# Altium PCB Shield.pcbdoc (part 1 of 2)
Units mm, origin at the board's own origin, x right, y up, seen from the top; angles counter-clockwise.
Board outline 57.12 x 53.38 mm, 2 copper layers (Top Layer, Bottom Layer); 40 components, 41 nets, 141 pads, 717 vias.
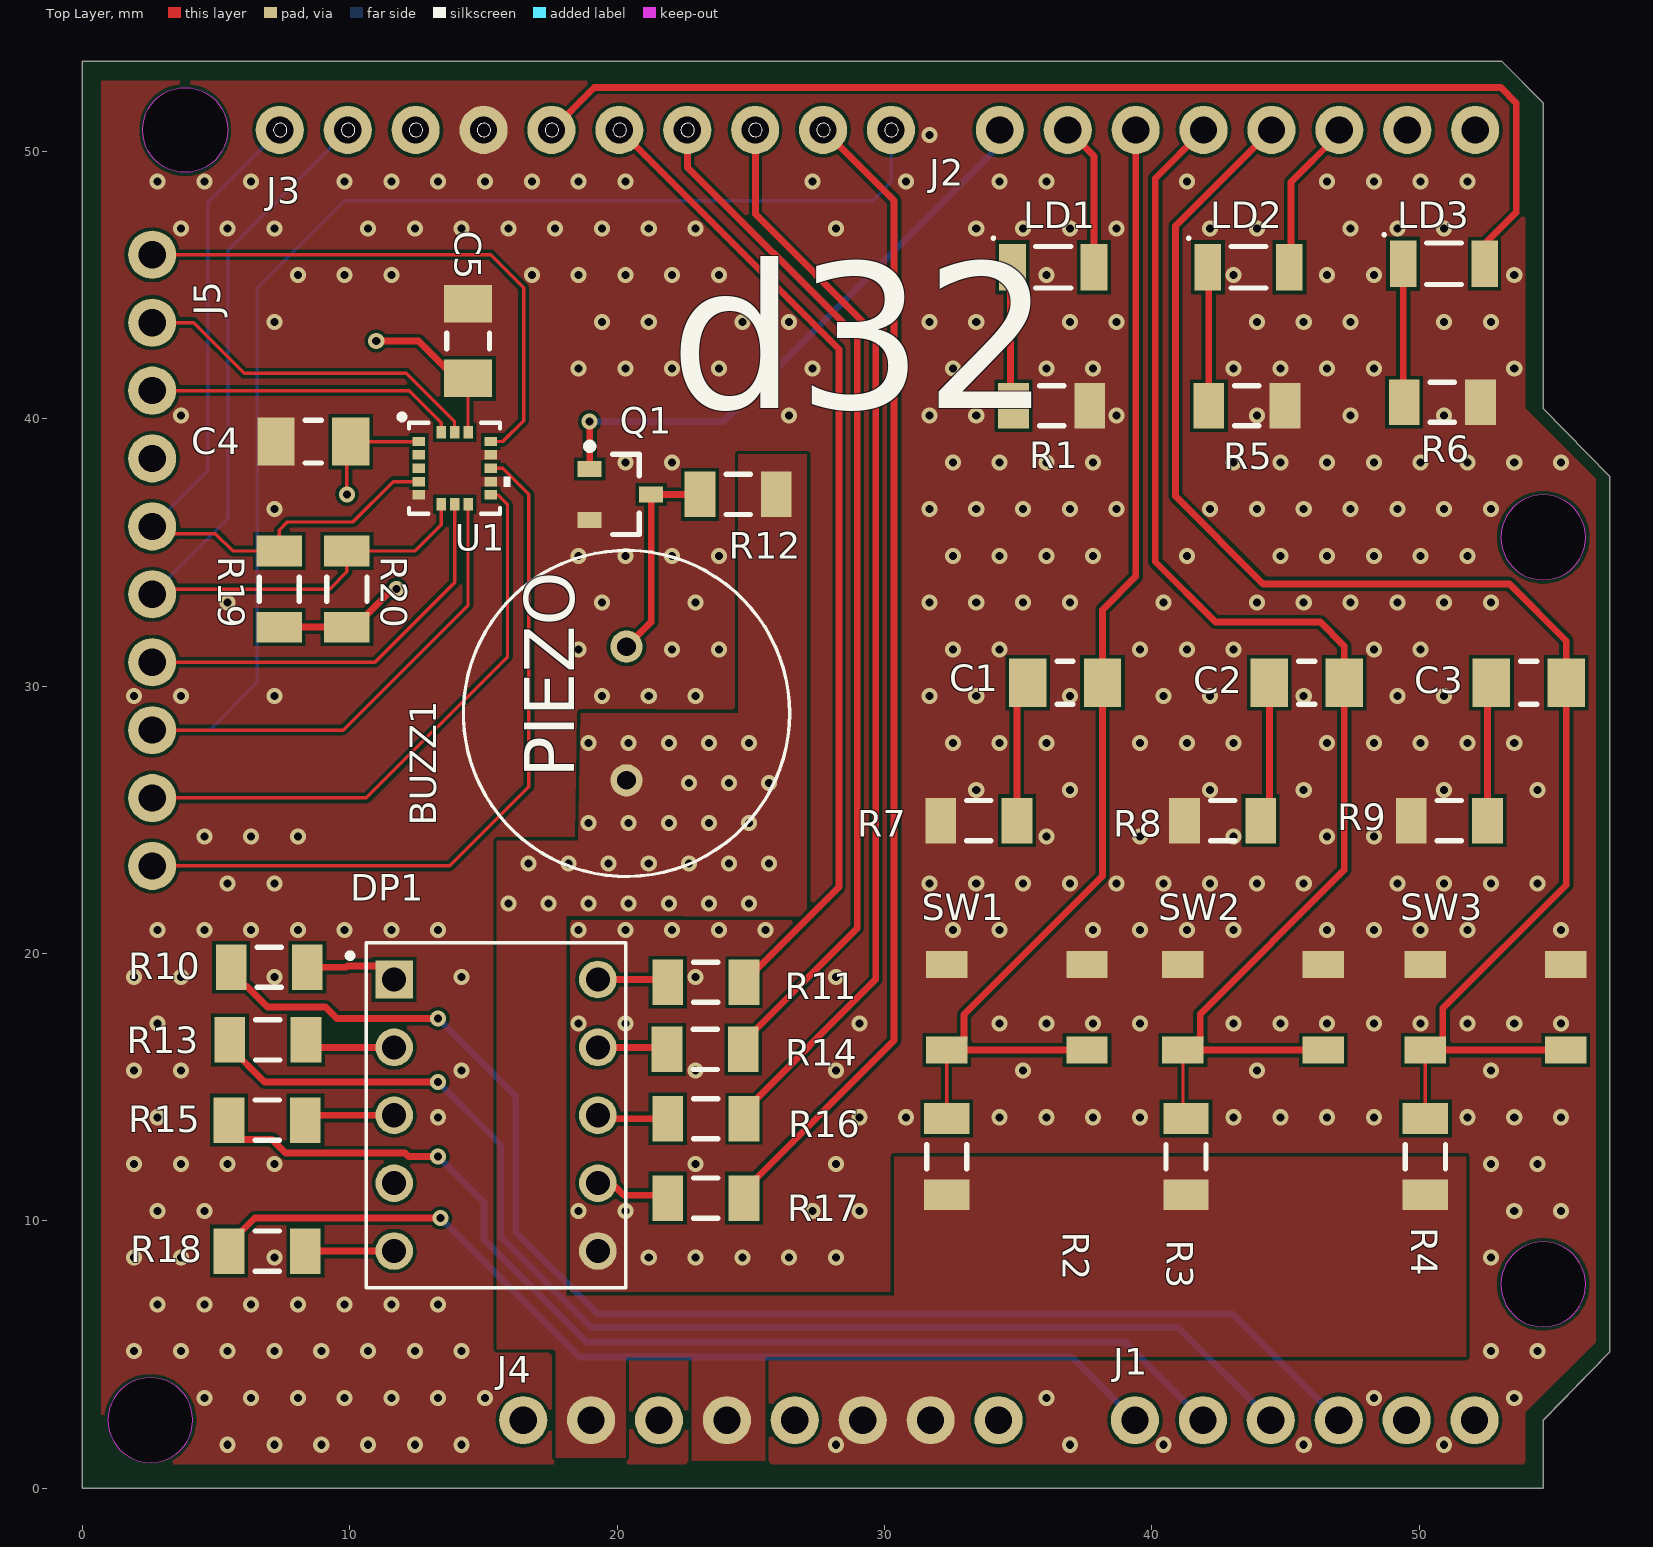
[diagram p0: Top Layer view]
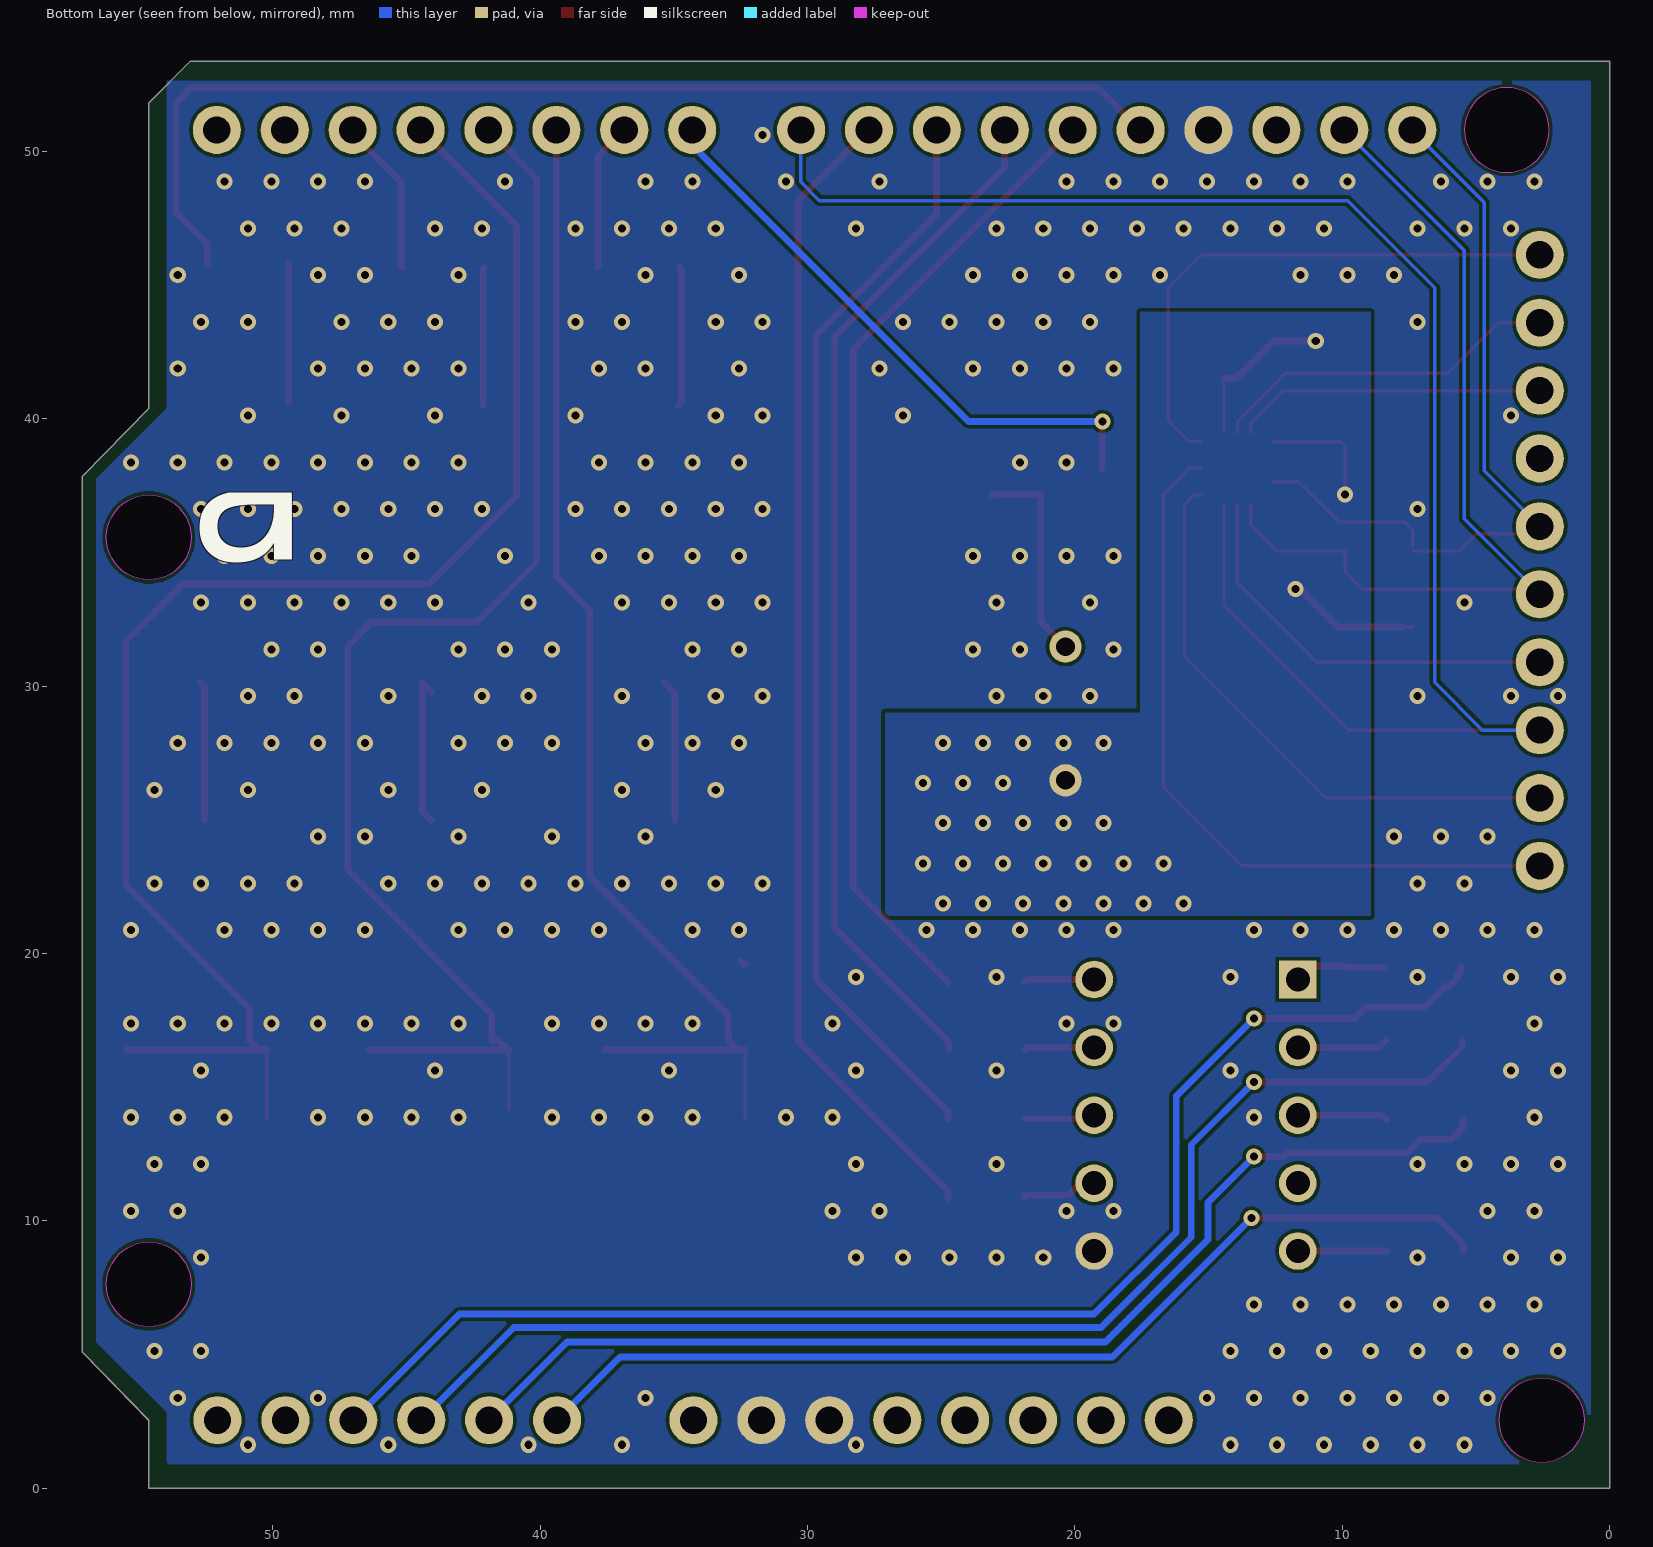
[diagram p1: Bottom Layer view, seen from below]
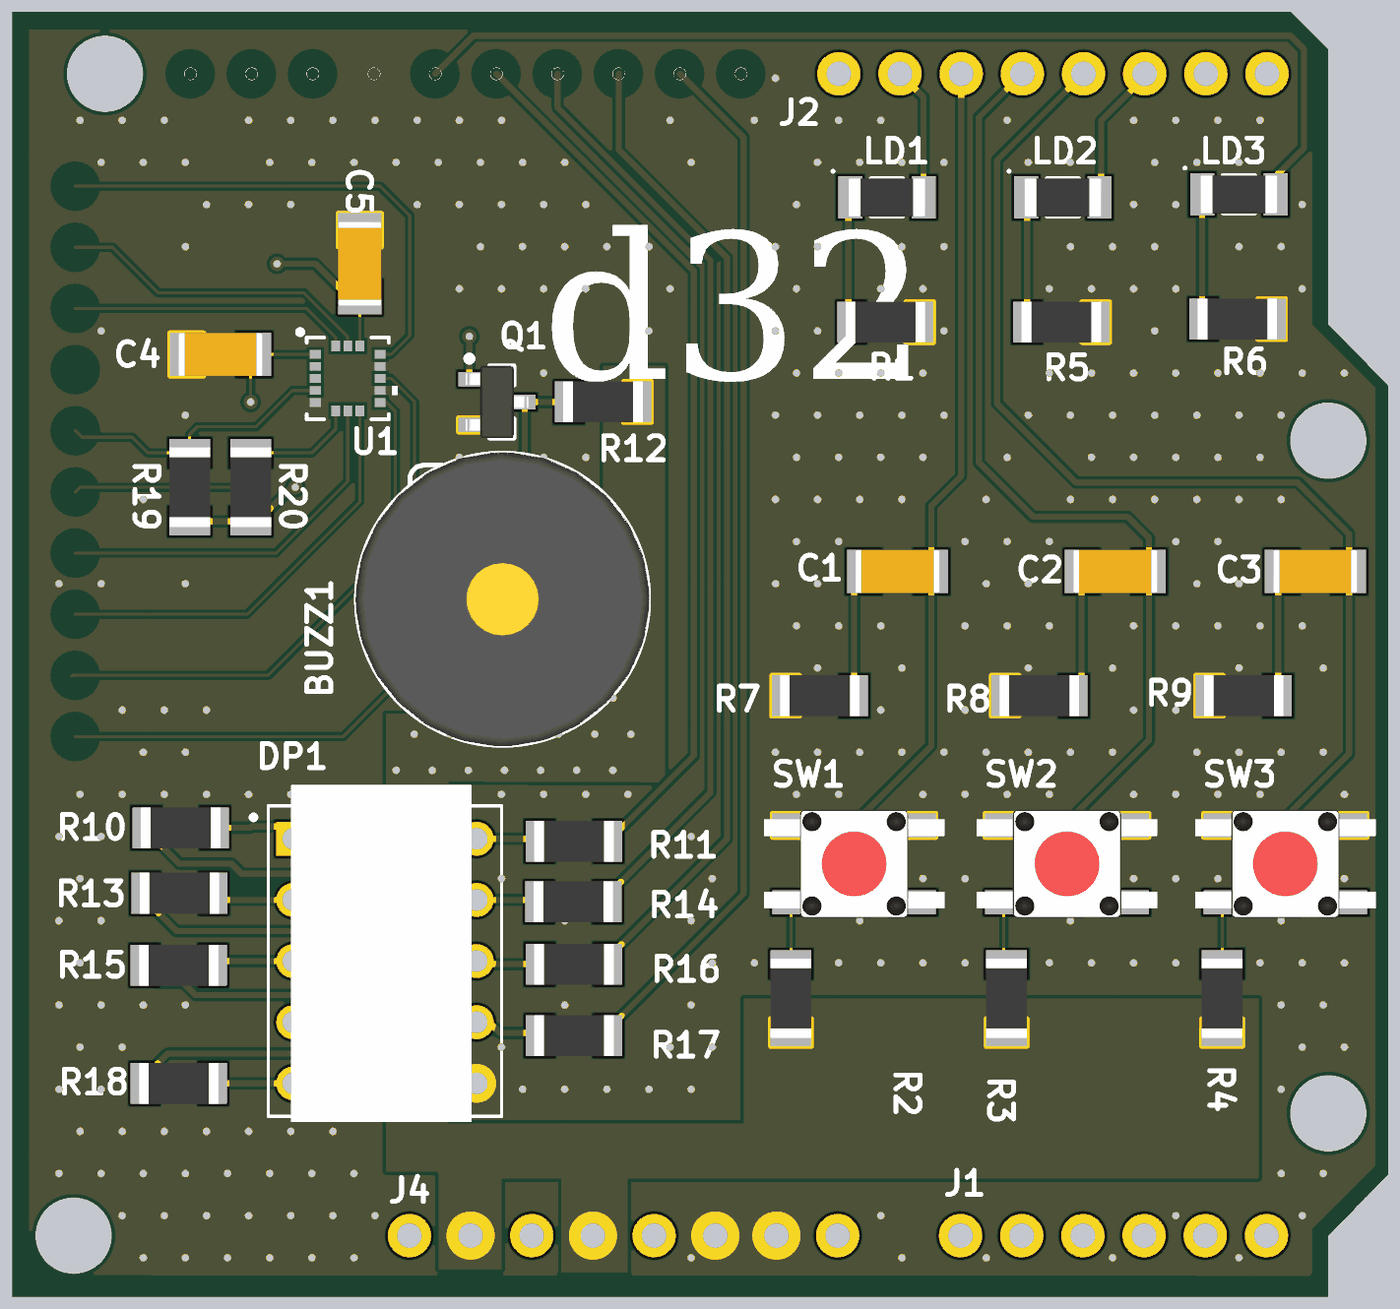
[diagram p2: 3D render of the assembled board from above, using the file's embedded part models]

## Layer stack, top to bottom
Top Solder: solder mask 0.0102, Solder Resist, Dk 3.2
Top Layer: signal copper 0.0356
Dielectric1: dielectric 0.32, FR-4, Dk 4.8
Bottom Layer: signal copper 0.0356
Bottom Solder: solder mask 0.0102, Solder Resist, Dk 3.2

## Board outline
0,0 0,53.378 53.075,53.378 54.64,51.814 54.64,40.386 57.12,37.846 57.12,5.08 54.64,2.54 54.64,0
cut-out: 0.953,2.54 ccw(c2.54,2.54) 2.54,0.953 ccw(c2.54,2.54) 4.127,2.54 ccw(c2.54,2.54) 2.54,4.127 ccw(c2.54,2.54)
cut-out: 53.052,7.62 ccw(c54.64,7.62) 54.64,6.032 ccw(c54.64,7.62) 56.227,7.62 ccw(c54.64,7.62) 54.64,9.207 ccw(c54.64,7.62)
cut-out: 53.052,35.56 ccw(c54.64,35.56) 54.64,33.972 ccw(c54.64,35.56) 56.227,35.56 ccw(c54.64,35.56) 54.64,37.148 ccw(c54.64,35.56)
cut-out: 3.84,49.212 cw(c3.84,50.8) 2.252,50.8 cw(c3.84,50.8) 3.84,52.387 cw(c3.84,50.8) 5.427,50.8 cw(c3.84,50.8)

## Design rules (kind name [scope] priority, off if disabled: settings)
Clearance [All] p1: gap=0.127 ignorepadtopadclearanceinfootprint=FALSE except(0: Arc-Hole Track-Hole SMDPad-Hole THPad-Hole Via-Hole Fill-Hole Poly-Hole Region-Hole Text-Hole)
FabricationTestPointUsage TestPointUsage [All] p1: valid=0 allowmultiple=FALSE
FabricationTestpoint Testpoint [All] p1: side=3 testpointundercomponent=TRUE minsize=1.016 maxsize=2.54 preferedsize=1.524 minholesize=0 maxholesize=1.016 preferedholesize=0.813 testpointgrid=0.025 allowsidetop=TRUE allowsidebottom=TRUE usegrid=TRUE gridtolerance=0
PolygonConnect [All] p1: connectstyle=Direct reliefconductorwidth=0.254 reliefentries=4 polygonreliefangle="90 Angle" airgapwidth=0.254
RoutingVias [All] p1: holewidth=0.711 width=1.27 viastyle="Through Hole" minholewidth=0.2 minwidth=0.45 maxholewidth=0.711 maxwidth=1.27
SilkToSolderMaskClearance SilkscreenOverComponentPads [IsPad] p1: minsilkscreentomaskgap=0.254 clearancetoexposedcopper=TRUE
SolderMaskExpansion [All] p1: expansion=0.102
Width [All] p1: maxlimit=0.254 minlimit=0.127 preferedwidth=0.254
27 further rules are at their usual default settings.

## Components (designator, comment, footprint, x,y, rotation, side; value= is the part's Value field where it differs from the comment)
BUZZ1 "BUZZER" BUZZER 20.35,28.974 r90 top
C1 "100nF" CAPC3216X12N 36.754,30.124 r0 top
C2 "100nF" CAPC3216X12N 45.796,30.124 r0 top
C3 "100nF" CAPC3216X12N 54.102,30.124 r0 top
C4 "10uF" CAPC3216X12N 8.639,39.144 r0 top
C5 "100nF" CAPC3216X12N 14.422,42.907 r270 top
DP1 "7-SEG" 7-SEG-DISPLAY 15.469,13.945 r0 top
J1 "6-POS-ARDUINO" "PIN 6" 39.37,2.54 r0 top
J2 "8-POS-ARDUINO" "PIN 8" 52.07,50.8 r180 top
J3 "10-POS-ARDUINO" "PIN 10" -61.334,50.8 r180 top
J4 "8-POS-ARDUINO" "PIN 8" 16.51,2.54 r0 top
J5 "10-POS-ARDUINO" "PIN 10" 2.607,-45.443 r270 top
LD1 "RED" DIOC3216X21N 36.311,45.667 r180 top
LD2 "GREEN" DIOC3216X21N 43.619,45.667 r180 top
LD3 "AMBER" DIOC3216X21N 50.927,45.796 r180 top
Q1 "MMBT3904,215" SOT95P230X110-3N 20.123,37.168 r0 top
R1 "240" RESC3115X06N 36.249,40.485 r0 top
R2 "4K7" RESC3115X06N 32.325,12.4 r270 top
R3 "4K7" RESC3115X06N 41.279,12.4 r270 top
R4 "4K7" RESC3115X06N 50.232,12.4 r270 top
R5 "240" RESC3115X06N 43.557,40.485 r0 top
R6 "240" RESC3115X06N 50.865,40.615 r0 top
R7 "100" RESC3115X06N 33.528,24.968 r0 top
R8 "100" RESC3115X06N 42.647,24.968 r0 top
R9 "100" RESC3115X06N 51.13,24.968 r0 top
R10 "100" RESC3115X06N 6.985,19.482 r180 top
R11 "100" RESC3115X06N 23.317,18.923 r180 top
R12 "1K" RESC3115X06N 24.527,37.168 r0 top
R13 "100" RESC3115X06N 6.934,16.764 r180 top
R14 "100" RESC3115X06N 23.292,16.408 r180 top
R15 "100" RESC3115X06N 6.909,13.767 r180 top
R16 "100" RESC3115X06N 23.317,13.818 r180 top
R17 "100" RESC3115X06N 23.317,10.846 r180 top
R18 "100" RESC3115X06N 6.909,8.865 r180 top
R19 "4K7" RESC3115X06N 7.359,33.628 r270 top
R20 "4K7" RESC3115X06N 9.892,33.628 r270 top
SW1 "BTN" BUTTON 34.95,17.983 r0 top
SW2 "BTN" BUTTON 43.79,17.983 r0 top
SW3 "BTN" BUTTON 52.857,17.983 r0 top
U1 "LIS3DHTR" LGA16 13.923,38.195 r0 top

## Footprints (in the part's own frame and the unit in brackets; to place one, negate y for a bottom-side part, rotate by r counter-clockwise, add the part's x,y. Pads: shape width x height; smd on the part's side, far side on the other; paste and mask are expansions set on the pad)
7-SEG-DISPLAY [mm]
  rect 1.408x1.408 hole 0.9: 1(-3.81,5.08)
  round 1.408 hole 0.9: 2(-3.81,2.54) 3(-3.81,0) 4(-3.81,-2.54) 5(-3.81,-5.08) 6(3.81,-5.08) 7(3.81,-2.54) 8(3.81,0) 9(3.81,2.54) 10(3.81,5.08)
  silkscreen extent -5.56,-6.45 4.85,6.45, body extent -3.9,-6.68 3.6,7.33, height 8.5
BUTTON [mm]
  rect 1.55x1 smd: 1(-2.625,1.6) 2(2.625,1.6) 3(-2.625,-1.6) 4(2.625,-1.6)
  body extent -3.75,-2.25 3.75,2.25, height 3.8
BUZZER [mm]
  round 1.208 hole 0.7: 1(-2.5,0) 2(2.5,0)
  silkscreen extent -6.1,-6.1 6.1,6.1, body extent -6.1,-6.1 6.1,6.1, height 6
CAPC3216X12N [mm] "Chip Capacitor, 2-Leads, Body 3,20x1,60mm, IPC Medium Density"
  rect 1.4x1.8 smd: 1(-1.4,0) 2(1.4,0)
  silkscreen extent -0.3,-0.8 0.3,0.8, body extent -1.75,-0.9 1.75,0.9, height 1.2
DIOC3216X21N [mm] "Chip Diode, 2-Leads, Body 3,20x1,60mm, IPC Medium Density"
  rect 1x1.75 smd: 1(-1.525,0) 2(1.525,0)
  silkscreen extent -0.65,-1.14 2.29,0.77, body extent -1.6,-0.8 1.6,0.8, height 2.06
LGA16 [mm]
  rect 0.456x0.354 smd paste+0 mask+0: 1(-1.347,0.953) 2(-1.347,0.453) 3(-1.347,-0.047) 4(-1.347,-0.547) 5(-1.347,-1.047) 9(1.345,-1.047) 10(1.345,-0.547) 11(1.345,-0.047) 12(1.345,0.453) 13(1.345,0.953)
  rect 0.354x0.456 smd paste+0 mask+0: 6(-0.501,-1.393) 7(-0.001,-1.393) 8(0.499,-1.393) 14(0.499,1.299) 15(-0.001,1.299) 16(-0.501,1.299)
  silkscreen extent -2.05,-1.75 2.08,1.95, body extent -1.78,-1.83 1.78,1.73, height 0.25
"PIN 6" [mm]
  round 1.8 hole 1.02: 1(0,0) 2(2.54,0) 3(5.08,0) 4(7.62,0) 5(10.16,0) 6(12.7,0)
"PIN 8" [mm]
  round 1.8 hole 1.02: 1(-0.025,0) 2(2.515,0) 3(5.055,0) 4(7.595,0) 5(10.135,0) 6(12.675,0) 7(15.215,0) 8(17.755,0)
"PIN 10" [mm]
  round 1.8 hole 1.02: 1(-91.575,0) 2(-89.035,0) 3(-86.495,0) 4(-83.955,0) 5(-81.415,0) 6(-78.875,0) 7(-76.335,0) 8(-73.795,0) 9(-71.255,0) 10(-68.715,0)
RESC3115X06N [mm] "Chip Resistor, 2-Leads, Body 3,10x1,50mm, IPC Medium Density"
  rect 1.15x1.7 smd: 1(-1.425,0) 2(1.425,0)
  silkscreen extent -0.45,-0.75 0.45,0.75, body extent -1.65,-0.85 1.65,0.85, height 0.6
SOT95P230X110-3N [mm] "SOT23, 3-Leads, Body 2,90x2,30mm, Pitch 0,95mm, IPC Medium Density"
  rect 0.9x0.6 smd: 1(-1.15,0.95) 2(-1.15,-0.95) 3(1.15,0)
  silkscreen extent -1.27,-1.5 0.7,1.92, body extent -1.3,-1.5 1.3,1.5, height 1.1

## Part data
BUZZ1: library part PS1240P02BT, "AUDIO PIEZO TRANSDUCER 30V TH", Frequency=4kHz, Manufacturer=TDK, Max Operating Temperature=70°C, Min Operating Temperature=-10°C, Operating Supply Voltage=3V, Package Quantity=1, Supplier Part Number 1=445-2525-1-ND, ComponentLink1Description=https://datasheet.ciiva.com/0/ef532-ps-112.pdf?src-supplier=Digi-Key, ComponentLink1URL=https://datasheet.ciiva.com/0/ef532-ps-112.pdf?src-supplier=Digi-Key, ComponentLink2Description=https://datasheet.ciiva.com/16225/ef532-ps-16225062.pdf?src-supplier=Onlinecomponents.com, ComponentLink2URL=https://datasheet.ciiva.com/16225/ef532-ps-16225062.pdf?src-supplier=Onlinecomponents.com, ComponentLink3Description=https://datasheet.ciiva.com/3306/ef532-ps-3306958.pdf?src-supplier=Avnet, ComponentLink3URL=https://datasheet.ciiva.com/3306/ef532-ps-3306958.pdf?src-supplier=Avnet, ComponentLink4Description=https://datasheet.ciiva.com/0/ef532-ps-111.pdf?src-supplier=Digi-Key, ComponentLink4URL=https://datasheet.ciiva.com/0/ef532-ps-111.pdf?src-supplier=Digi-Key, Diameter=12.2mm, Height=6.5mm, Lead Free="Lead Free", Manufacturer Part Number=PS1240P02BT, Mount="Through Hole", Number of Terminals=2, Packaging="Tape and Reel", Pricing 1="1 = 0,68000, 10 = 0,57800, 25 = 0,54040, 50 = 0,51240, 100 = 0,48530 (USD)", RoHS=Yes, Stock 1=21154, Supplier 1=Digi-Key, Termination="PC Pins", Voltage Rating (DC)=3V, Washable=No
C1 C2 C3 C5: library part CC1206KRX7R9BB104, "CAP CER 0.1UF 50V X7R 1206", Case/Package=1206, Case Code (Metric)=3216, Dielectric=X7R, Insulation Resistance=100GR, Manufacturer=Yageo, Max Operating Temperature=125°C, Min Operating Temperature=-55°C, Package Quantity=1, Supplier Part Number 1=311-1179-1-ND, Tolerance=10%, Voltage=50V, Capacitance=100nF, Case Code (Imperial)=1206, ComponentLink1Description=https://datasheet.ciiva.com/11786/0900766b80d84f1d-11786968.pdf?src-supplier=RSComponents, ComponentLink1URL=https://datasheet.ciiva.com/11786/0900766b80d84f1d-11786968.pdf?src-supplier=RSComponents, ComponentLink2Description=https://datasheet.ciiva.com/7978/1489800-7978230.pdf?src-supplier=Element14, ComponentLink2URL=https://datasheet.ciiva.com/7978/1489800-7978230.pdf?src-supplier=Element14, ComponentLink3Description=https://datasheet.ciiva.com/16625/upy-gphc-x7r-6-3v-to-50v-8-16625558.pdf?src-supplier=Avnet+Europe, ComponentLink3URL=https://datasheet.ciiva.com/16625/upy-gphc-x7r-6-3v-to-50v-8-16625558.pdf?src-supplier=Avnet+Europe, ComponentLink4Description=https://datasheet.ciiva.com/46385/1734573-46385063.pdf?src-supplier=Element14, ComponentLink4URL=https://datasheet.ciiva.com/46385/1734573-46385063.pdf?src-supplier=Element14, ComponentLink5Description=https://datasheet.ciiva.com/28363/1734573-28363672.pdf?src-supplier=Element14, ComponentLink5URL=https://datasheet.ciiva.com/28363/1734573-28363672.pdf?src-supplier=Element14, ComponentLink6Description=https://datasheet.ciiva.com/144/mlccorderingcode-144905.pdf?src-supplier=Digi-Key, ComponentLink6URL=https://datasheet.ciiva.com/144/mlccorderingcode-144905.pdf?src-supplier=Digi-Key, ComponentLink7Description=https://datasheet.ciiva.com/5425/upy-gp-np0-16v-to-50v-8-3714-5425561.pdf?src-supplier=Mouser, ComponentLink7URL=https://datasheet.ciiva.com/5425/upy-gp-np0-16v-to-50v-8-3714-5425561.pdf?src-supplier=Mouser, ComponentLink8Description=https://datasheet.ciiva.com/144/mlccorderingcode-144906.pdf?src-supplier=Digi-Key, ComponentLink8URL=https://datasheet.ciiva.com/144/mlccorderingcode-144906.pdf?src-supplier=Digi-Key, ComponentLink9Description=https://datasheet.ciiva.com/144/mlccorderingcode-144907.pdf?src-supplier=Digi-Key, ComponentLink9URL=https://datasheet.ciiva.com/144/mlccorderingcode-144907.pdf?src-supplier=Digi-Key, ComponentLink10Description=https://datasheet.ciiva.com/15189/getdatasheetpartid-251811-15189275.pdf?src-supplier=Verical, ComponentLink10URL=https://datasheet.ciiva.com/15189/getdatasheetpartid-251811-15189275.pdf?src-supplier=Verical, ComponentLink11Description=https://datasheet.ciiva.com/28450/1489800-28450892.pdf?src-supplier=Element14, ComponentLink11URL=https://datasheet.ciiva.com/28450/1489800-28450892.pdf?src-supplier=Element14, Depth=1.6mm, Halogen Free="Halogen Free", Height=0.85mm, Lead Free="Lead Free", Length=3.2mm, Manufacturer Part Number=CC1206KRX7R9BB104, Material=Ceramic, Mount="Surface Mount", Number of Pins=2, Packaging="Tape and Reel", Pricing 1="1 = 0,19000, 10 = 0,13000, 100 = 0,06610, 500 = 0,04520, 1000 = 0,03999 (USD)", Radiation Hardening=No, REACH SVHC=Unknown, RoHS=Yes, Stock 1=5890110, Supplier 1=Digi-Key, Termination=SMD/SMT, Thickness=0.033inch, Voltage Rating=50V, Voltage Rating (DC)=50V, Width=0.063inch
C4: library part CL21A106KPFNNNG, "Cap Ceramic 10uF 10V X5R 10% SMD 0805 85C Embossed T/R", Case/Package=0805, Case Code (Metric)=2012, Dielectric=X5R, Manufacturer 1=Samsung, Max Operating Temperature=85°C, Min Operating Temperature=-55°C, Package Quantity=3000, Supplier Part Number 1=1276-6456-1-ND, Tolerance=10%, Voltage=10V, Capacitance=10uF, Case Code (Imperial)=0805, ComponentLink1Description=https://datasheet.ciiva.com/16428/cl21a106kpfnnng-16428896.pdf?src-supplier=Future+Electronics, ComponentLink1URL=https://datasheet.ciiva.com/16428/cl21a106kpfnnng-16428896.pdf?src-supplier=Future+Electronics, ComponentLink2Description=https://datasheet.ciiva.com/26936/getdatasheetpartid-640497-26936900.pdf?src-supplier=Verical, ComponentLink2URL=https://datasheet.ciiva.com/26936/getdatasheetpartid-640497-26936900.pdf?src-supplier=Verical, Depth=1.25mm, Height=1.25mm, Lead Free="Lead Free", Length=2mm, Manufacturer Part Number 1=CL21A106KPFNNNG, Mount="Surface Mount", Packaging="Tape and Reel", Pricing 1="1=0,13000, 10=0,09100, 100=0,04300, 500=0,03016, 1000=0,02497 (USD)", Radiation Hardening=No, RoHS=Yes, Stock 1=742439, Supplier 1=Digi-Key, Termination=Wraparound, Thickness=0.053inch, Voltage Rating=10V, Width=0.049inch
DP1: library part INND-TS40YGCB, Manufacturer=Inolux, Supplier Part Number 1=1830-1154-ND, Manufacturer Part Number=INND-TS40YGCB, Pricing 1="1 = 1,10000, 10 = 0,89500, 100 = 0,55080, 500 = 0,46818, 1000 = 0,38556, 2500 = 0,36628, 5000 = 0,35802, 10000 = 0,34976, 25000 = 0,34425 (USD)", RoHS=No, Stock 1=5781, Supplier 1=Digi-Key
J1: library part PREC006SABN-RC, "Conn Header Vert 6POS 2.54MM", Color=Black, Manufacturer=Sullins, Package Quantity=1, Supplier Part Number 1=S1022EC-06-ND, ComponentLink1Description=https://datasheet.ciiva.com/741/xrxczzzsxxn-rc-st-11635-b-741039.pdf?src-supplier=Digi-Key, ComponentLink1URL=https://datasheet.ciiva.com/741/xrxczzzsxxn-rc-st-11635-b-741039.pdf?src-supplier=Digi-Key, Connector Type="Male Pin", Contact Mating Length=0.23inch, Contact Plating=Tin, Manufacturer Part Number=PREC006SABN-RC, Mount="Through Hole", Number of Positions=6, Number of Rows=1, Packaging=Bulk, Pitch=0.1inch, Pricing 1="1 = 0,16000, 10 = 0,15100, 25 = 0,12920, 50 = 0,11280, 100 = 0,10480, 250 = 0,09272, 500 = 0,08870 (USD)", RoHS=Yes, Stock 1=1610, Supplier 1=Digi-Key, Termination=Solder
J2: library part PREC008SAAN-RC, "CONN HEADER VERT 8POS 2.54MM", Color=Black, Manufacturer=Sullins, Package Quantity=1, Supplier Part Number 1=S1012EC-08-ND, ComponentLink1Description=https://datasheet.ciiva.com/740/zrzczzzszzn-rc-st-11635-b-740837.pdf?src-supplier=Digi-Key, ComponentLink1URL=https://datasheet.ciiva.com/740/zrzczzzszzn-rc-st-11635-b-740837.pdf?src-supplier=Digi-Key, Connector Type="Male Pin", Contact Mating Length=0.23inch, Contact Plating=Tin, Manufacturer Part Number=PREC008SAAN-RC, Mount="Through Hole", Number of Positions=8, Number of Rows=1, Packaging=Bulk, Pitch=0.1inch, Pricing 1="1 = 0,19000, 10 = 0,17800, 25 = 0,15200, 50 = 0,13300, 100 = 0,12360, 250 = 0,10928, 500 = 0,10454 (USD)", RoHS=Yes, Stock 1=3323, Supplier 1=Digi-Key, Termination=Solder
J3 J5: library part PREC010SAAN-RC, "CONN HEADER .100\" SNGL STR 10POS", Color=Black, Manufacturer=Sullins, Package Quantity=1, Supplier Part Number 1=S1012EC-10-ND, ComponentLink1Description=https://datasheet.ciiva.com/740/zrzczzzszzn-rc-st-11635-b-740835.pdf?src-supplier=Digi-Key, ComponentLink1URL=https://datasheet.ciiva.com/740/zrzczzzszzn-rc-st-11635-b-740835.pdf?src-supplier=Digi-Key, Connector Type="Male Pin", Contact Mating Length=0.23inch, Contact Plating=Tin, Manufacturer Part Number=PREC010SAAN-RC, Mount="Through Hole", Number of Positions=10, Number of Rows=1, Packaging=Bulk, Pitch=0.1inch, Pricing 1="1 = 0,24000, 10 = 0,22300, 25 = 0,19000, 50 = 0,16640, 100 = 0,15440, 250 = 0,13664, 500 = 0,13068 (USD)", RoHS=Yes, Stock 1=2330, Supplier 1=Digi-Key, Termination=Solder
J4: library part "PREC008SAAN-RC (2)", "CONN HEADER VERT 8POS 2.54MM", Color=Black, Manufacturer=Sullins, Manufacturer Part Number=PREC008SAAN-RC, Package Quantity=1, Supplier Part Number 1=S1012EC-08-ND, ComponentLink1Description=https://datasheet.ciiva.com/740/zrzczzzszzn-rc-st-11635-b-740837.pdf?src-supplier=Digi-Key, ComponentLink1URL=https://datasheet.ciiva.com/740/zrzczzzszzn-rc-st-11635-b-740837.pdf?src-supplier=Digi-Key, Connector Type="Male Pin", Contact Mating Length=0.23inch, Contact Plating=Tin, Mount="Through Hole", Number of Positions=8, Number of Rows=1, Packaging=Bulk, Pitch=0.1inch, Pricing 1="1 = 0,19000, 10 = 0,17800, 25 = 0,15200, 50 = 0,13300, 100 = 0,12360, 250 = 0,10928, 500 = 0,10454 (USD)", RoHS=Yes, Stock 1=3323, Supplier 1=Digi-Key, Termination=Solder
LD1: library part LTST-C150CKT, "LED Uni-Color Red 660nm 2-Pin Chip LED T/R", Case/Package=1206, Case Code (Metric)=3216, Color=Red, Forward Current=40mA, Forward Voltage=1.8V, Lens Color=Colorless, Manufacturer="Vishay Lite-On", Max Operating Temperature=85°C, Max Power Dissipation=100mW, Min Operating Temperature=-55°C, Package Quantity=1, Reverse Voltage=5V, Supplier Part Number 1=160-1167-1-ND, Test Current=10mA, Case Code (Imperial)=1206, ComponentLink1Description=https://datasheet.ciiva.com/2110/ltst-c150ckt-2110225.pdf?src-supplier=Digi-Key, ComponentLink1URL=https://datasheet.ciiva.com/2110/ltst-c150ckt-2110225.pdf?src-supplier=Digi-Key, ComponentLink2Description=https://datasheet.ciiva.com/16222/lite-on20ltst-c150ckt-16222610.pdf?src-supplier=Future+Electronics, ComponentLink2URL=https://datasheet.ciiva.com/16222/lite-on20ltst-c150ckt-16222610.pdf?src-supplier=Future+Electronics, ComponentLink3Description=https://datasheet.ciiva.com/11775/0900766b80dc025c-11775635.pdf?src-supplier=RSComponents, ComponentLink3URL=https://datasheet.ciiva.com/11775/0900766b80dc025c-11775635.pdf?src-supplier=RSComponents, ComponentLink4Description=https://datasheet.ciiva.com/15117/getdatasheetpartid-103928-15117444.pdf?src-supplier=Verical, ComponentLink4URL=https://datasheet.ciiva.com/15117/getdatasheetpartid-103928-15117444.pdf?src-supplier=Verical, ComponentLink5Description=https://datasheet.ciiva.com/19465/697733-19465844.pdf?src-supplier=Jameco, ComponentLink5URL=https://datasheet.ciiva.com/19465/697733-19465844.pdf?src-supplier=Jameco, ComponentLink6Description=https://datasheet.ciiva.com/2110/s-110-ltst-c150ckt-2110226.pdf?src-supplier=Digi-Key, ComponentLink6URL=https://datasheet.ciiva.com/2110/s-110-ltst-c150ckt-2110226.pdf?src-supplier=Digi-Key, ComponentLink7Description=https://datasheet.ciiva.com/2110/s-110-ltst-c150ckt-2110227.pdf?src-supplier=Digi-Key, ComponentLink7URL=https://datasheet.ciiva.com/2110/s-110-ltst-c150ckt-2110227.pdf?src-supplier=Digi-Key, Depth=1.6mm, Dominant Wavelength=638nm, Height=1.1mm, Illumination Color=Red, Lead Free="Lead Free", Length=3.2mm, Lens Style=Diffused, Lens Transparency=Clear, Luminous Intensity=25mcd, Manufacturer Part Number=LTST-C150CKT, Mount="Surface Mount", Number of Elements=1, Number of LEDs=1, Number of Pins=2, Packaging="Tape and Reel", Power Dissipation=100mW, Power Rating=100mW, Pricing 1="1 = 0,35000, 10 = 0,25700, 100 = 0,12190, 500 = 0,08128, 1000 = 0,06366 (USD)", Radiation Hardening=No, RoHS=Yes, Stock 1=244566, Supplier 1=Digi-Key, Viewing Angle=130°, Wavelength=660nm, Width=1.6mm
LD2: library part LTST-C150GKT, "LED GREEN CLEAR 1206 SMD", Case/Package=1206, Case Code (Metric)=3216, Color=Green, Forward Current=30mA, Forward Voltage=2.1V, Lens Color=Colorless, Manufacturer="Vishay Lite-On", Max Operating Temperature=85°C, Max Power Dissipation=100mW, Min Operating Temperature=-55°C, Package Quantity=1, Reverse Voltage=5V, Supplier Part Number 1=160-1169-1-ND, Test Current=10mA, Case Code (Imperial)=1206, ComponentLink1Description=https://datasheet.ciiva.com/2110/ltst-c150gkt-2110032.pdf?src-supplier=Digi-Key, ComponentLink1URL=https://datasheet.ciiva.com/2110/ltst-c150gkt-2110032.pdf?src-supplier=Digi-Key, ComponentLink2Description=https://datasheet.ciiva.com/12400/lite-on-ltst-c150gkt-187412-12400912.pdf?src-supplier=Mouser, ComponentLink2URL=https://datasheet.ciiva.com/12400/lite-on-ltst-c150gkt-187412-12400912.pdf?src-supplier=Mouser, ComponentLink3Description=https://datasheet.ciiva.com/11775/0900766b80dc0263-11775637.pdf?src-supplier=RSComponents, ComponentLink3URL=https://datasheet.ciiva.com/11775/0900766b80dc0263-11775637.pdf?src-supplier=RSComponents, ComponentLink4Description=https://datasheet.ciiva.com/4266/s-110-ltst-c150gkt-4266310.pdf?src-supplier=Arrow, ComponentLink4URL=https://datasheet.ciiva.com/4266/s-110-ltst-c150gkt-4266310.pdf?src-supplier=Arrow, ComponentLink5Description=https://datasheet.ciiva.com/16375/ltst-c150gkt-16375926.pdf?src-supplier=Future+Electronics, ComponentLink5URL=https://datasheet.ciiva.com/16375/ltst-c150gkt-16375926.pdf?src-supplier=Future+Electronics, ComponentLink6Description=https://datasheet.ciiva.com/15117/getdatasheetpartid-142080-15117739.pdf?src-supplier=Verical, ComponentLink6URL=https://datasheet.ciiva.com/15117/getdatasheetpartid-142080-15117739.pdf?src-supplier=Verical, Depth=1.6mm, Dominant Wavelength=569nm, Height=1.1mm, Illumination Color=Green, Lead Free="Lead Free", Length=3.2mm, Lens Style=Diffused, Lens Transparency=Clear, Luminous Intensity=6mcd, Manufacturer Part Number=LTST-C150GKT, Mount="Surface Mount", Number of Elements=1, Number of LEDs=1, Number of Pins=2, Packaging="Tape and Reel", Power Dissipation=100mW, Power Rating=100mW, Pricing 1="1 = 0,33000, 10 = 0,24000, 100 = 0,11390, 500 = 0,07594, 1000 = 0,05948 (USD)", Radiation Hardening=No, RoHS=Yes, Stock 1=429365, Supplier 1=Digi-Key, Viewing Angle=130°, Wavelength=565nm, Width=1.6mm
LD3: library part LTST-C150AKT, "LED AMBER CLEAR 1206 SMD", Case/Package=1206, Case Code (Metric)=3216, Color=Orange, Forward Current=30mA, Forward Voltage=2.1V, Lens Color=Colorless, Manufacturer="Vishay Lite-On", Max Operating Temperature=85°C, Min Operating Temperature=-55°C, Package Quantity=1, Power Dissipation=100mW, Reverse Voltage=5V, Supplier Part Number 1=160-1166-1-ND, Test Current=10mA, Case Code (Imperial)=1206, ComponentLink1Description=https://datasheet.ciiva.com/2110/ltst-c150akt-2110240.pdf?src-supplier=Digi-Key, ComponentLink1URL=https://datasheet.ciiva.com/2110/ltst-c150akt-2110240.pdf?src-supplier=Digi-Key, ComponentLink2Description=https://datasheet.ciiva.com/15117/getdatasheetpartid-147499-15117854.pdf?src-supplier=Verical, ComponentLink2URL=https://datasheet.ciiva.com/15117/getdatasheetpartid-147499-15117854.pdf?src-supplier=Verical, ComponentLink3Description=https://datasheet.ciiva.com/11774/0900766b80dc025b-11774743.pdf?src-supplier=RSComponents, ComponentLink3URL=https://datasheet.ciiva.com/11774/0900766b80dc025b-11774743.pdf?src-supplier=RSComponents, ComponentLink4Description=https://datasheet.ciiva.com/2110/ltst-c150akt-2110241.pdf?src-supplier=Digi-Key, ComponentLink4URL=https://datasheet.ciiva.com/2110/ltst-c150akt-2110241.pdf?src-supplier=Digi-Key, ComponentLink5Description=https://datasheet.ciiva.com/2110/ltst-c150akt-2110242.pdf?src-supplier=Digi-Key, ComponentLink5URL=https://datasheet.ciiva.com/2110/ltst-c150akt-2110242.pdf?src-supplier=Digi-Key, ComponentLink6Description=https://datasheet.ciiva.com/16448/ltst-c150akt-16448581.pdf?src-supplier=Future+Electronics, ComponentLink6URL=https://datasheet.ciiva.com/16448/ltst-c150akt-16448581.pdf?src-supplier=Future+Electronics, Depth=1.6mm, Dominant Wavelength=602nm, Height=1.1mm, Illumination Color=Orange, Lead Free="Lead Free", Length=3.2mm, Lens Style=Clear, Lens Transparency=Clear, Luminous Intensity=6mcd, Manufacturer Part Number=LTST-C150AKT, Mount="Surface Mount", Number of Elements=1, Number of LEDs=1, Number of Pins=2, Packaging="Tape and Reel", Power Rating=100mW, Pricing 1="1 = 0,35000, 10 = 0,25700, 100 = 0,12190, 500 = 0,08128, 1000 = 0,06366 (USD)", Radiation Hardening=No, RoHS=Yes, Stock 1=13106, Supplier 1=Digi-Key, Viewing Angle=130°, Wavelength=610nm, Width=1.6mm
Q1: "TRANS NPN 40V 0.2A SOT23", Manufacturer=Nexperia, Supplier Part Number 1=1727-4044-1-ND, ComponentLink1Description=http://www.farnell.com/datasheets/2328888.pdf?src-supplier=Farnell, ComponentLink1URL=http://www.farnell.com/datasheets/2328888.pdf?src-supplier=Farnell, ComponentLink2Description=https://assets.nexperia.com/documents/data-sheet/MMBT3904.pdf?src-supplier=Digi-Key, ComponentLink2URL=https://assets.nexperia.com/documents/data-sheet/MMBT3904.pdf?src-supplier=Digi-Key, ComponentLink3Description=http://www.farnell.com/datasheets/2328888.pdf?src-supplier=Newark, ComponentLink3URL=http://www.farnell.com/datasheets/2328888.pdf?src-supplier=Newark, Manufacturer Part Number=MMBT3904,215, Pricing 1="1 = 0,10000, 10 = 0,09500, 100 = 0,05180, 500 = 0,03188, 1000 = 0,02174 (USD)", RoHS=No, Stock 1=214014, Supplier 1=Digi-Key
R1 R5 R6: library part RMCF1206FT240R, "Res Thick Film 1206 240 Ohm 1% 0.25W(1/4W) ±100ppm/C Molded SMD Automotive T/R", Case/Package=1206, Case Code (Metric)=3216, Manufacturer="Stackpole Electronics", Max Operating Temperature=155°C, Max Power Dissipation=250mW, Min Operating Temperature=-55°C, Resistance=240R, Supplier Part Number 1=RMCF1206FT240RCT-ND, Temperature Coefficient=100ppm/°C, Tolerance=1%, Case Code (Imperial)=1206, ComponentLink1Description=http://components.arrow.com/part/dataview/46929293S8409770N1174?src-supplier=Arrow, ComponentLink1URL=http://components.arrow.com/part/dataview/46929293S8409770N1174?src-supplier=Arrow, ComponentLink2Description=https://www.verical.com/server-webapp/html/getDatasheet?partID=465735&src-supplier=Verical, ComponentLink2URL=https://www.verical.com/server-webapp/html/getDatasheet?partID=465735&src-supplier=Verical, ComponentLink3Description=https://www.seielect.com/Catalog/SEI-RMCF_RMCP.pdf?src-supplier=Digi-Key, ComponentLink3URL=https://www.seielect.com/Catalog/SEI-RMCF_RMCP.pdf?src-supplier=Digi-Key, ComponentLink4Description=https://www.seielect.com/catalog/SEI-Packaging.pdf?src-supplier=Digi-Key, ComponentLink4URL=https://www.seielect.com/catalog/SEI-Packaging.pdf?src-supplier=Digi-Key, ComponentLink5Description=https://www.seielect.com/catalog/SEI-RMCF_RMCP.pdf?src-supplier=Avnet, ComponentLink5URL=https://www.seielect.com/catalog/SEI-RMCF_RMCP.pdf?src-supplier=Avnet, Composition="Thick Film", Contact Plating=Tin, Depth=1.6mm, Features="Automotive AEC-Q200", Height=0.028inch, Length=0.126inch, Manufacturer Part Number=RMCF1206FT240R, Military Standard=Not, Mount="Surface Mount", Number of Terminations=2, Packaging="Tape and Reel", Pricing 1="1 = 0,10000, 10 = 0,03600, 100 = 0,01470, 1000 = 0,00659, 2500 = 0,00572 (USD)", Radiation Hardening=No, RoHS=Yes, Stock 1=2191, Supplier 1=Digi-Key, Width=0.063inch
R2 R3 R4 R19 R20: library part RMCF1206FT4K70, "RES SMD 4.7K OHM 1% 1/4W 1206", Case/Package=1206, Case Code (Metric)=3216, Manufacturer="Stackpole Electronics", Max Operating Temperature=155°C, Max Power Dissipation=250mW, Min Operating Temperature=-55°C, Resistance=4.7kR, Supplier Part Number 1=RMCF1206FT4K70CT-ND, Temperature Coefficient=100ppm/°C, Tolerance=1%, Case Code (Imperial)=1206, ComponentLink1Description=https://www.seielect.com/Catalog/SEI-RMCF_RMCP.pdf?src-supplier=Digi-Key, ComponentLink1URL=https://www.seielect.com/Catalog/SEI-RMCF_RMCP.pdf?src-supplier=Digi-Key, ComponentLink2Description=https://www.verical.com/server-webapp/html/getDatasheet?partID=408276&src-supplier=Verical, ComponentLink2URL=https://www.verical.com/server-webapp/html/getDatasheet?partID=408276&src-supplier=Verical, ComponentLink3Description=http://components.arrow.com/part/dataview/44988237S7495835N1174?src-supplier=Arrow, ComponentLink3URL=http://components.arrow.com/part/dataview/44988237S7495835N1174?src-supplier=Arrow, Composition="Thick Film", Contact Plating=Tin, Depth=1.6mm, Features="Automotive AEC-Q200", Height=0.028inch, Length=0.126inch, Manufacturer Part Number=RMCF1206FT4K70, Military Standard=Not, Mount="Surface Mount", Number of Terminations=2, Packaging="Tape and Reel", Pricing 1="1 = 0,10000, 10 = 0,03600, 100 = 0,01470, 1000 = 0,00659, 2500 = 0,00572 (USD)", Radiation Hardening=No, RoHS=Yes, Stock 1=133615, Supplier 1=Digi-Key, Width=0.063inch
R7 R8 R9 R10 R11 R13 R14 R15 R16 R17 R18: library part RMCF1206FT100R, "RES 100 OHM 1% 1/4W 1206", Case/Package=1206, Case Code (Metric)=3216, Manufacturer="Stackpole Electronics", Max Operating Temperature=155°C, Max Power Dissipation=250mW, Min Operating Temperature=-55°C, Resistance=100R, Supplier Part Number 1=RMCF1206FT100RCT-ND, Temperature Coefficient=100ppm/°C, Tolerance=1%, Case Code (Imperial)=1206, ComponentLink1Description=https://www.seielect.com/catalog/SEI-RMCF_RMCP.pdf?src-supplier=Avnet, ComponentLink1URL=https://www.seielect.com/catalog/SEI-RMCF_RMCP.pdf?src-supplier=Avnet, ComponentLink2Description=http://www.seielect.com/Catalog/SEI-rmc.pdf?src-supplier=Future+Electronics, ComponentLink2URL=http://www.seielect.com/Catalog/SEI-rmc.pdf?src-supplier=Future+Electronics, ComponentLink3Description=https://www.seielect.com/Catalog/SEI-RMCF_RMCP.pdf?src-supplier=Digi-Key, ComponentLink3URL=https://www.seielect.com/Catalog/SEI-RMCF_RMCP.pdf?src-supplier=Digi-Key, ComponentLink4Description=http://components.arrow.com/part/dataview/44988349S7171862N1174?src-supplier=Arrow, ComponentLink4URL=http://components.arrow.com/part/dataview/44988349S7171862N1174?src-supplier=Arrow, ComponentLink5Description=https://www.verical.com/server-webapp/html/getDatasheet?partID=372149&src-supplier=Verical, ComponentLink5URL=https://www.verical.com/server-webapp/html/getDatasheet?partID=372149&src-supplier=Verical, Composition="Thick Film", Contact Plating=Tin, Depth=1.6mm, Features="Automotive AEC-Q200", Height=0.028inch, Lead Free="Lead Free", Length=0.126inch, Manufacturer Part Number=RMCF1206FT100R, Military Standard=Not, Mount="Surface Mount", Number of Terminations=2, Packaging="Tape and Reel", Power Rating=250mW, Pricing 1="1 = 0,10000, 10 = 0,03600, 100 = 0,01470, 1000 = 0,00659, 2500 = 0,00572 (USD)", Radiation Hardening=No, RoHS=Yes, Stock 1=384311, Supplier 1=Digi-Key, Width=0.063inch
R12: library part RNCP1206FTD1K00, "RES 1K OHM 1% 1/2W 1206", Case/Package=1206, Case Code (Metric)=3216, Manufacturer="Stackpole Electronics", Max Operating Temperature=155°C, Max Power Dissipation=500mW, Min Operating Temperature=-55°C, Resistance=1kR, Supplier Part Number 1=RNCP1206FTD1K00CT-ND, Temperature Coefficient=100ppm/°C, Tolerance=1%, Case Code (Imperial)=1206, ComponentLink1Description=https://www.seielect.com/catalog/SEI-Packaging.pdf?src-supplier=Digi-Key, ComponentLink1URL=https://www.seielect.com/catalog/SEI-Packaging.pdf?src-supplier=Digi-Key, ComponentLink2Description=http://www.seielect.com/Catalog/SEI-rncp.pdf?src-supplier=Avnet, ComponentLink2URL=http://www.seielect.com/Catalog/SEI-rncp.pdf?src-supplier=Avnet, Composition="Thin Film", Contact Plating=Tin, Features="Moisture Resistant", Height=0.024inch, Lead Free="Lead Free", Length=0.122inch, Manufacturer Part Number=RNCP1206FTD1K00, Mount="Surface Mount", Number of Terminations=2, Packaging="Tape and Reel", Pricing 1="1 = 0,10000, 10 = 0,09300, 100 = 0,03580, 1000 = 0,01575, 2500 = 0,01360 (USD)", Radiation Hardening=No, RoHS=Yes, Stock 1=424850, Supplier 1=Digi-Key, Width=0.059inch
SW1 SW2 SW3: library part PTS647SK70SMTR2LFS, "INWALL LENS COVER , WHITE , 6 (", Manufacturer="ITT C&K", Supplier Part Number 1=PTS647SK70SMTR2LFSCT-ND, Manufacturer Part Number=PTS647SK70SMTR2LFS, Pricing 1="1 = 0,14000, 10 = 0,14000, 25 = 0,13520, 50 = 0,13020, 100 = 0,12310, 250 = 0,11580, 500 = 0,11100 (USD)", RoHS=No, Stock 1=97905, Supplier 1=Digi-Key
U1: "ACCEL 2-16G I2C/SPI 16LGA", Case/Package=LGA, Manufacturer 1=STMicroelectronics, Max Operating Temperature=85°C, Max Supply Voltage=3.6V, Min Operating Temperature=-40°C, Min Supply Voltage=1.71V, Operating Supply Current=11uA, Operating Supply Voltage=2.5V, Package Quantity=1, Supplier Part Number 1=497-10613-1-ND, Axis="X, Y, Z", Bandwidth=5kHz, ComponentLink1Description=https://datasheet.ciiva.com/7621/1718591-7621744.pdf?src-supplier=Element14, ComponentLink1URL=https://datasheet.ciiva.com/7621/1718591-7621744.pdf?src-supplier=Element14, ComponentLink2Description=https://datasheet.ciiva.com/16638/cd00274221-16638192.pdf?src-supplier=Avnet+Europe, ComponentLink2URL=https://datasheet.ciiva.com/16638/cd00274221-16638192.pdf?src-supplier=Avnet+Europe, ComponentLink3Description=https://datasheet.ciiva.com/5296/cd00274221-117431-5296513.pdf?src-supplier=Mouser, ComponentLink3URL=https://datasheet.ciiva.com/5296/cd00274221-117431-5296513.pdf?src-supplier=Mouser, ComponentLink4Description=https://datasheet.ciiva.com/26928/lis3dhtr-26928589.pdf?src-supplier=IIIC, ComponentLink4URL=https://datasheet.ciiva.com/26928/lis3dhtr-26928589.pdf?src-supplier=IIIC, ComponentLink5Description=https://datasheet.ciiva.com/2810/cd00274221-2810008.pdf?src-supplier=Digi-Key, ComponentLink5URL=https://datasheet.ciiva.com/2810/cd00274221-2810008.pdf?src-supplier=Digi-Key, ComponentLink6Description=https://datasheet.ciiva.com/2810/cd00274221-2810009.pdf?src-supplier=Digi-Key, ComponentLink6URL=https://datasheet.ciiva.com/2810/cd00274221-2810009.pdf?src-supplier=Digi-Key, ComponentLink7Description=https://datasheet.ciiva.com/48495/cd00274221-48495849.pdf?src-supplier=Avnet, ComponentLink7URL=https://datasheet.ciiva.com/48495/cd00274221-48495849.pdf?src-supplier=Avnet, ComponentLink8Description=https://datasheet.ciiva.com/2810/cd00274221-2810010.pdf?src-supplier=Digi-Key, ComponentLink8URL=https://datasheet.ciiva.com/2810/cd00274221-2810010.pdf?src-supplier=Digi-Key, ComponentLink9Description=https://datasheet.ciiva.com/16216/cd00274221-16216362.pdf?src-supplier=Future+Electronics, ComponentLink9URL=https://datasheet.ciiva.com/16216/cd00274221-16216362.pdf?src-supplier=Future+Electronics, ComponentLink10Description=https://datasheet.ciiva.com/16470/cd00274221-16470411.pdf?src-supplier=Avnet+Asia, ComponentLink10URL=https://datasheet.ciiva.com/16470/cd00274221-16470411.pdf?src-supplier=Avnet+Asia, ComponentLink11Description=https://datasheet.ciiva.com/3271/cd00274221-3271807.pdf?src-supplier=Avnet, ComponentLink11URL=https://datasheet.ciiva.com/3271/cd00274221-3271807.pdf?src-supplier=Avnet, Contact Plating=Gold, Depth=3mm, Height=1mm, Interface=I2C,SPI, Lead Free="Lead Free", Length=3mm, Manufacturer Part Number 1=LIS3DHTR, Max Supply Voltage (DC)=3.6V, Min Supply Voltage (DC)=1.71V, Number of Pins=16, Output Type=Digital, Packaging="Tape and Reel", Pricing 1="1=1,53000, 10=1,36700, 100=1,06610, 500=0,88066, 1000=0,69525 (USD)", Radiation Hardening=No, REACH SVHC="No SVHC", Resolution=16b, RoHS=Yes, Sensor Type="3 Axis", Stock 1=64337, Supplier 1=Digi-Key, Width=3mm

## Via types
v1: diameter 0.6, hole 0.3, Top Layer to Bottom Layer, tented both sides, 717 vias

## Nets (pads, with @x,y where several pads share a name; then routed paths per layer and width w, separated by ;. In a path a pad name is that pad's centre, name@x,y a point inside that pad or via, vN(x,y) a via of type N, cw(c..) or ccw(c..) an arc to the next point about the centre after c; other vN are vias at no path point)
+3V3: BUZZ1.1 C4.2 C5.2 J4.2 J4.4 R2.2 R3.2 R4.2 R12.2 R19.2 R20.2 U1.1 U1.14 | length 15.6
  Top Layer w0.127: R19.2 7.713,32.203 R19.2@7.722,32.212 ; v1(9.892,37.168) 9.892,38.997 C4.2 12.572,39.144 U1.1 ; U1.14 C5.2
  Top Layer w0.254: R19.2@7.722,32.212 9.883,32.212 R20.2 10.167,32.203 11.592,33.628 v1(11.744,33.628) ; v1(10.989,42.907) 12.576,42.907 13.976,41.507 C5.2
  other v1: 15.932,21.87 17.432,21.87 18.932,21.87 20.432,21.87 21.932,21.87 23.432,21.87 24.932,21.87 16.682,23.37 18.182,23.37 19.682,23.37 21.182,23.37 22.682,23.37 24.182,23.37 25.682,23.37 18.932,24.87 20.432,24.87 21.932,24.87 23.432,24.87 24.932,24.87 22.682,26.37 24.182,26.37 25.682,26.37 18.932,27.87 20.432,27.87 21.932,27.87 23.432,27.87 24.932,27.87
ADC1: J5.3 U1.16 | length 11.7
  Top Layer w0.127: J5.3 12.22,41.052 13.422,39.849 U1.16
ADC2: J5.2 U1.15 | length 13.2
  Top Layer w0.127: J5.2 4.157,43.592 6.049,41.7 12.111,41.7 13.917,39.894 13.917,39.499 U1.15
ADC3: J5.1 U1.13 | length 20.9
  Top Layer w0.127: J5.1 15.268,46.132 16.5,44.9 16.5,39.927 15.72,39.148 U1.13
AMBERBTN: C2.2 J2.5 R3.1 SW2.3 SW2.4 | length 50.5
  Top Layer w0.127: R3.1@41.165,14.143 SW2.3
  Top Layer w0.254: SW2.3 SW2.3@41.207,16.383 ; J2.5 41.91,50.8 41.91,50.775 40.127,48.992 40.127,34.649 42.379,32.397 46.303,32.397 47.196,31.504 C2.2 47.196,23.117 41.813,17.733 41.813,16.756 41.58,16.756 SW2.3@41.207,16.383 ; SW2.4 SW2.3@41.207,16.383
AMBERLED: J2.3 LD2.1 | length 6
  Top Layer w0.254: LD2.1 45.207,45.73 45.207,48.856 46.898,50.547 47.015,50.547 J2.3
DP1: J1.4 R10.2 | length 51.6
  Top Layer w0.254: R10.2 5.56,19.357 5.69,19.228 5.69,19.077 6.008,18.759 6.159,18.759 6.922,17.995 9.092,17.995 9.517,17.57 v1(13.3,17.57)
  Bottom Layer w0.254: v1(13.3,17.57) 16.205,14.664 16.205,9.583 19.279,6.51 43.02,6.51 J1.4
DP2: J1.3 R13.2 | length 47
  Top Layer w0.254: R13.2 5.509,16.489 6.809,15.189 v1(13.3,15.189)
  Bottom Layer w0.254: v1(13.3,15.189) 15.646,12.843 15.646,9.382 19.026,6.002 40.988,6.002 J1.3
DP3: J1.2 R15.2 | length 42.1
  Top Layer w0.254: R15.2 5.484,13.492 5.932,13.044 7.093,13.044 7.601,12.536 12.062,12.536 12.198,12.4 v1(13.3,12.4)
  Bottom Layer w0.254: v1(13.3,12.4) 15.015,10.685 15.015,9.295 18.849,5.461 38.989,5.461 J1.2
DP5: J1.1 R18.2 | length 37.7
  Top Layer w0.254: R18.2 5.484,9.14 6.444,10.1 v1(13.4,10.1)
  Bottom Layer w0.254: v1(13.4,10.1) 18.598,4.902 37.008,4.902 J1.1
DP7: J3.2 R17.1 | length 43.4
  Top Layer w0.254: R17.1 24.742,11.121 30.36,16.739 30.36,48.156 J3.2@27.716,50.8
DP8: J3.3 R16.1 | length 40.9
  Top Layer w0.254: R16.1 24.742,14.093 29.67,19.02 29.67,43.157 25.176,47.65 J3.3@25.176,50.8
DP9: J3.4 R14.1 | length 38.8
  Top Layer w0.254: J3.4@22.636,50.8 22.636,49.398 28.984,43.051 28.984,20.95 24.717,16.683 R14.1
DP10: J3.5 R11.1 | length 36.7
  Top Layer w0.254: J3.5@20.096,50.8 28.298,42.598 28.298,22.479 R11.1
GND: C4.1 C5.1 DP1.6 J3.7 J4.6 J4.7 Q1.2 R1.2 R5.2 R6.2 R7.1 R8.1 R9.1 SW1.1 SW1.2 SW2.1 SW2.2 SW3.1 SW3.2 U1.5 U1.10 U1.12 | length 0.2
  Top Layer w0.254: SW1.1 32.385,19.583 SW1.1@32.512,19.71
  other v1: 5.432,1.62 5.432,1.62 7.182,1.62 7.182,1.62 8.932,1.62 8.932,1.62 10.682,1.62 10.682,1.62 12.432,1.62 12.432,1.62 14.182,1.62 14.182,1.62 28.182,1.62 28.182,1.62 36.932,1.62 36.932,1.62 40.432,1.62 40.432,1.62 45.682,1.62 45.682,1.62 50.932,1.62 50.932,1.62 4.557,3.37 4.557,3.37 6.307,3.37 6.307,3.37 8.057,3.37 8.057,3.37 9.807,3.37 9.807,3.37 11.557,3.37 11.557,3.37 13.307,3.37 13.307,3.37 15.057,3.37 15.057,3.37 36.057,3.37 36.057,3.37 48.307,3.37 48.307,3.37 53.557,3.37 53.557,3.37 1.932,5.12 1.932,5.12 3.682,5.12 3.682,5.12 5.432,5.12 5.432,5.12 7.182,5.12 7.182,5.12 8.932,5.12 8.932,5.12 10.682,5.12 10.682,5.12 12.432,5.12 12.432,5.12 14.182,5.12 14.182,5.12 52.682,5.12 52.682,5.12 54.432,5.12 54.432,5.12 2.807,6.87 2.807,6.87 4.557,6.87 4.557,6.87 6.307,6.87 6.307,6.87 8.057,6.87 8.057,6.87 9.807,6.87 9.807,6.87 11.557,6.87 11.557,6.87 13.307,6.87 13.307,6.87 1.932,8.62 1.932,8.62 3.682,8.62 3.682,8.62 7.182,8.62 7.182,8.62 21.182,8.62 21.182,8.62 22.932,8.62 22.932,8.62 24.682,8.62 24.682,8.62 26.432,8.62 26.432,8.62 28.182,8.62 28.182,8.62 52.682,8.62 52.682,8.62 2.807,10.37 2.807,10.37 4.557,10.37 4.557,10.37 18.557,10.37 18.557,10.37 20.307,10.37 20.307,10.37 27.307,10.37 27.307,10.37 29.057,10.37 29.057,10.37 53.557,10.37 53.557,10.37 55.307,10.37 55.307,10.37 1.932,12.12 1.932,12.12 3.682,12.12 3.682,12.12 5.432,12.12 5.432,12.12 7.182,12.12 7.182,12.12 22.932,12.12 22.932,12.12 28.182,12.12 28.182,12.12 52.682,12.12 52.682,12.12 54.432,12.12 54.432,12.12 2.807,13.87 2.807,13.87 13.307,13.87 13.307,13.87 29.057,13.87 29.057,13.87 30.807,13.87 30.807,13.87 34.307,13.87 34.307,13.87 36.057,13.87 36.057,13.87 37.807,13.87 37.807,13.87 39.557,13.87 39.557,13.87 43.057,13.87 43.057,13.87 44.807,13.87 44.807,13.87 46.557,13.87 46.557,13.87 48.307,13.87 48.307,13.87 51.807,13.87 51.807,13.87 53.557,13.87 53.557,13.87 55.307,13.87 55.307,13.87 1.932,15.62 1.932,15.62 3.682,15.62 3.682,15.62 14.182,15.62 14.182,15.62 22.932,15.62 22.932,15.62 28.182,15.62 28.182,15.62 35.182,15.62 35.182,15.62 43.932,15.62 43.932,15.62 52.682,15.62 52.682,15.62 2.807,17.37 2.807,17.37 18.557,17.37 18.557,17.37 20.307,17.37 20.307,17.37 29.057,17.37 29.057,17.37 34.307,17.37 34.307,17.37 36.057,17.37 36.057,17.37 37.807,17.37 37.807,17.37 39.557,17.37 39.557,17.37 43.057,17.37 43.057,17.37 44.807,17.37 44.807,17.37 46.557,17.37 46.557,17.37 48.307,17.37 48.307,17.37 50.057,17.37 50.057,17.37 51.807,17.37 51.807,17.37 53.557,17.37 53.557,17.37 55.307,17.37 55.307,17.37 1.932,19.12 1.932,19.12 3.682,19.12 3.682,19.12 7.182,19.12 7.182,19.12 14.182,19.12 14.182,19.12 22.932,19.12 22.932,19.12 28.182,19.12 28.182,19.12 2.807,20.87 2.807,20.87 4.557,20.87 4.557,20.87 6.307,20.87 6.307,20.87 8.057,20.87 8.057,20.87 9.807,20.87 9.807,20.87 11.557,20.87 11.557,20.87 13.307,20.87 13.307,20.87 18.557,20.87 18.557,20.87 20.307,20.87 20.307,20.87 22.057,20.87 22.057,20.87 23.807,20.87 23.807,20.87 25.557,20.87 25.557,20.87 32.557,20.87 32.557,20.87 34.307,20.87 34.307,20.87 37.807,20.87 37.807,20.87 39.557,20.87 39.557,20.87 41.307,20.87 41.307,20.87 43.057,20.87 43.057,20.87 46.557,20.87 46.557,20.87 48.307,20.87 48.307,20.87 50.057,20.87 50.057,20.87 51.807,20.87 51.807,20.87 55.307,20.87 55.307,20.87 5.432,22.62 5.432,22.62 7.182,22.62 7.182,22.62 31.682,22.62 31.682,22.62 33.432,22.62 33.432,22.62 35.182,22.62 35.182,22.62 36.932,22.62 36.932,22.62 38.682,22.62 38.682,22.62 40.432,22.62 40.432,22.62 42.182,22.62 42.182,22.62 43.932,22.62 43.932,22.62 45.682,22.62 45.682,22.62 49.182,22.62 49.182,22.62 50.932,22.62 50.932,22.62 52.682,22.62 52.682,22.62 54.432,22.62 54.432,22.62 4.557,24.37 4.557,24.37 6.307,24.37 6.307,24.37 8.057,24.37 8.057,24.37 36.057,24.37 36.057,24.37 39.557,24.37 39.557,24.37 43.057,24.37 43.057,24.37 46.557,24.37 46.557,24.37 48.307,24.37 48.307,24.37 33.432,26.12 33.432,26.12 36.932,26.12 36.932,26.12 42.182,26.12 42.182,26.12 45.682,26.12 45.682,26.12 50.932,26.12 50.932,26.12 54.432,26.12 54.432,26.12 32.557,27.87 32.557,27.87 34.307,27.87 34.307,27.87 36.057,27.87 36.057,27.87 39.557,27.87 39.557,27.87 41.307,27.87 41.307,27.87 43.057,27.87 43.057,27.87 46.557,27.87 46.557,27.87 48.307,27.87 48.307,27.87 50.057,27.87 50.057,27.87 51.807,27.87 51.807,27.87 53.557,27.87 53.557,27.87 1.932,29.62 1.932,29.62 3.682,29.62 3.682,29.62 7.182,29.62 7.182,29.62 19.432,29.62 19.432,29.62 21.182,29.62 21.182,29.62 22.932,29.62 22.932,29.62 31.682,29.62 31.682,29.62 33.432,29.62 33.432,29.62 36.932,29.62 36.932,29.62 40.432,29.62 40.432,29.62 42.182,29.62 42.182,29.62 45.682,29.62 45.682,29.62 49.182,29.62 49.182,29.62 50.932,29.62 50.932,29.62 18.557,31.37 18.557,31.37 22.057,31.37 22.057,31.37 23.807,31.37 23.807,31.37 32.557,31.37 32.557,31.37 34.307,31.37 34.307,31.37 39.557,31.37 39.557,31.37 41.307,31.37 41.307,31.37 43.057,31.37 43.057,31.37 48.307,31.37 48.307,31.37 50.057,31.37 50.057,31.37 5.432,33.12 5.432,33.12 19.432,33.12 19.432,33.12 22.932,33.12 22.932,33.12 31.682,33.12 31.682,33.12 33.432,33.12 33.432,33.12 35.182,33.12 35.182,33.12 36.932,33.12 36.932,33.12 40.432,33.12 40.432,33.12 43.932,33.12 43.932,33.12 45.682,33.12 45.682,33.12 47.432,33.12 47.432,33.12 49.182,33.12 49.182,33.12 50.932,33.12 50.932,33.12 52.682,33.12 52.682,33.12 18.557,34.87 18.557,34.87 20.307,34.87 20.307,34.87 22.057,34.87 22.057,34.87 23.807,34.87 23.807,34.87 32.557,34.87 32.557,34.87 34.307,34.87 34.307,34.87 36.057,34.87 36.057,34.87 37.807,34.87 37.807,34.87 41.307,34.87 41.307,34.87 44.807,34.87 44.807,34.87 46.557,34.87 46.557,34.87 48.307,34.87 48.307,34.87 50.057,34.87 50.057,34.87 51.807,34.87 51.807,34.87 7.182,36.62 7.182,36.62 31.682,36.62 31.682,36.62 33.432,36.62 33.432,36.62 35.182,36.62 35.182,36.62 36.932,36.62 36.932,36.62 38.682,36.62 38.682,36.62 42.182,36.62 42.182,36.62 43.932,36.62 43.932,36.62 45.682,36.62 45.682,36.62 47.432,36.62 47.432,36.62 49.182,36.62 49.182,36.62 50.932,36.62 50.932,36.62 52.682,36.62 52.682,36.62 20.307,38.37 20.307,38.37 22.057,38.37 22.057,38.37 32.557,38.37 32.557,38.37 34.307,38.37 34.307,38.37 36.057,38.37 36.057,38.37 37.807,38.37 37.807,38.37 43.057,38.37 43.057,38.37 44.807,38.37 44.807,38.37 46.557,38.37 46.557,38.37 48.307,38.37 48.307,38.37 50.057,38.37 50.057,38.37 51.807,38.37 51.807,38.37 53.557,38.37 53.557,38.37 55.307,38.37 55.307,38.37 3.682,40.12 3.682,40.12 26.432,40.12 26.432,40.12 31.682,40.12 31.682,40.12 33.432,40.12 33.432,40.12 38.682,40.12 38.682,40.12 43.932,40.12 43.932,40.12 47.432,40.12 47.432,40.12 50.932,40.12 50.932,40.12 18.557,41.87 18.557,41.87 20.307,41.87 20.307,41.87 22.057,41.87 22.057,41.87 23.807,41.87 23.807,41.87 27.307,41.87 27.307,41.87 32.557,41.87 32.557,41.87 36.057,41.87 36.057,41.87 37.807,41.87 37.807,41.87 43.057,41.87 43.057,41.87 44.807,41.87 44.807,41.87 46.557,41.87 46.557,41.87 48.307,41.87 48.307,41.87 53.557,41.87 53.557,41.87 7.182,43.62 7.182,43.62 19.432,43.62 19.432,43.62 21.182,43.62 21.182,43.62 22.932,43.62 22.932,43.62 24.682,43.62 24.682,43.62 26.432,43.62 26.432,43.62 31.682,43.62 31.682,43.62 33.432,43.62 33.432,43.62 36.932,43.62 36.932,43.62 38.682,43.62 38.682,43.62 43.932,43.62 43.932,43.62 45.682,43.62 45.682,43.62 47.432,43.62 47.432,43.62 50.932,43.62 50.932,43.62 52.682,43.62 52.682,43.62 8.057,45.37 8.057,45.37 9.807,45.37 9.807,45.37 11.557,45.37 11.557,45.37 16.807,45.37 16.807,45.37 18.557,45.37 18.557,45.37 20.307,45.37 20.307,45.37 22.057,45.37 22.057,45.37 23.807,45.37 23.807,45.37 32.557,45.37 32.557,45.37 36.057,45.37 36.057,45.37 43.057,45.37 43.057,45.37 46.557,45.37 46.557,45.37 48.307,45.37 48.307,45.37 53.557,45.37 53.557,45.37 3.682,47.12 3.682,47.12 5.432,47.12 5.432,47.12 7.182,47.12 7.182,47.12 10.682,47.12 10.682,47.12 12.432,47.12 12.432,47.12 14.182,47.12 14.182,47.12 15.932,47.12 15.932,47.12 17.682,47.12 17.682,47.12 19.432,47.12 19.432,47.12 21.182,47.12 21.182,47.12 22.932,47.12 22.932,47.12 28.182,47.12 28.182,47.12 33.432,47.12 33.432,47.12 35.182,47.12 35.182,47.12 36.932,47.12 36.932,47.12 38.682,47.12 38.682,47.12 42.182,47.12 42.182,47.12 43.932,47.12 43.932,47.12 47.432,47.12 47.432,47.12 49.182,47.12 49.182,47.12 50.932,47.12 50.932,47.12 2.807,48.87 2.807,48.87 4.557,48.87 4.557,48.87 6.307,48.87 6.307,48.87 9.807,48.87 9.807,48.87 11.557,48.87 11.557,48.87 13.307,48.87 13.307,48.87 15.057,48.87 15.057,48.87 16.807,48.87 16.807,48.87 18.557,48.87 18.557,48.87 20.307,48.87 20.307,48.87 27.307,48.87 27.307,48.87 30.807,48.87 30.807,48.87 34.307,48.87 34.307,48.87 36.057,48.87 36.057,48.87 41.307,48.87 41.307,48.87 46.557,48.87 46.557,48.87 48.307,48.87 48.307,48.87 50.057,48.87 50.057,48.87 51.807,48.87 51.807,48.87 31.682,50.62 31.682,50.62
I2C_EN: J3.1 J5.8 U1.8 | length 64.3
  Top Layer w0.127: J5.8 9.752,28.352 14.422,33.022 U1.8
  Bottom Layer w0.127: J5.8 4.752,28.352 6.535,30.135 6.535,44.896 9.795,48.156 29.556,48.156 30.256,48.856 J3.1@30.256,50.8
I2C_SCL: J3.10 J5.5 R19.1 U1.4 | length 28.5
  Top Layer w0.127: J5.5 2.875,35.704 4.971,35.704 5.622,35.053 R19.1 ; R19.1@7.359,35.247 7.359,35.83 7.666,36.137 10.118,36.137 11.628,37.648 U1.4
  Bottom Layer w0.127: J5.5 4.684,38.049 4.684,48.088 J3.10@7.396,50.8
I2C_SDA: J3.9 J5.6 R20.1 U1.6 | length 33.5
  Top Layer w0.127: J5.6 2.803,33.628 9.252,33.628 9.892,34.268 R20.1 12.441,35.053 13.422,36.034 U1.6
  Bottom Layer w0.127: J5.6 5.427,36.253 5.427,46.291 J3.9@9.936,50.8
I2C_SDO: J5.7 U1.7 | length 15.5
  Top Layer w0.127: J5.7 10.941,30.892 13.922,33.873 U1.7
INT1: J5.10 U1.11 | length 28.1
  Top Layer w0.127: J5.10 13.732,23.272 16.7,26.241 16.7,37.168 15.72,38.148 U1.11
INT2: J5.9 U1.9 | length 22.2
  Top Layer w0.127: J5.9@2.462,25.8 J5.9@2.474,25.812 ; J5.9 J5.9@2.474,25.812 ; U1.9 15.531,37.148 15.9,36.779 15.9,31.1 10.619,25.818 2.48,25.818 J5.9@2.474,25.812
NetBUZZ1_2: BUZZ1.2 Q1.3 R12.1 | length 7.9
  Top Layer w0.254: BUZZ1.2 21.273,32.397 Q1.3 22.87,37.168 22.89,37.148 22.91,37.168 R12.1
NetC1_1: C1.1 R7.2 | length 5.3
  Top Layer w0.254: R7.2 34.953,29.724 C1.1
NetC2_1: C2.1 R8.2 | length 5.7
  Top Layer w0.254: R8.2 44.396,25.293 C2.1 C2.1@44.072,29.8
NetC3_1: C3.1 R9.2 | length 5.2
  Top Layer w0.254: R9.2 52.555,29.978 C3.1
NetDP1_1: DP1.1 R10.1 | length 3.5
  Top Layer w0.254: R10.1 9.855,19.482 9.906,19.533 11.151,19.533 DP1.1
NetDP1_2: DP1.2 R13.1 | length 3.4
  Top Layer w0.254: R13.1 8.639,16.485 DP1.2
NetDP1_3: DP1.3 R15.1 | length 3.4
  Top Layer w0.254: R15.1 8.512,13.945 DP1.3
NetDP1_5: DP1.5 R18.1 | length 3.3
  Top Layer w0.254: R18.1 DP1.5
NetDP1_7: DP1.7 R17.2 | length 2.9
  Top Layer w0.254: DP1.7 19.795,11.405 20.243,10.957 21.892,10.957 R17.2
NetDP1_8: DP1.8 R16.2 | length 2.7
  Top Layer w0.254: DP1.8 19.406,13.818 R16.2
NetDP1_9: DP1.9 R14.2 | length 2.6
  Top Layer w0.254: DP1.9 21.791,16.485 R14.2
NetDP1_10: DP1.10 R11.2 | length 2.8
  Top Layer w0.254: DP1.10@19.202,19.101 DP1.10 21.791,19.025 R11.2
NetLD1_2: LD1.2 R1.1 | length 5.3
  Top Layer w0.254: LD1.2 34.711,45.592 34.711,40.598 R1.1
NetLD2_2: LD2.2 R5.1 | length 5.2
  Top Layer w0.254: LD2.2 42.132,45.629 R5.1
NetLD3_2: LD3.2 R6.1 | length 5.2
  Top Layer w0.254: LD3.2 49.402,40.652 R6.1
PWM: J2.8 Q1.1 | length 22
  Top Layer w0.254: Q1.1 v1(18.973,39.894)
  Bottom Layer w0.254: v1(18.973,39.894) 23.977,39.894 34.028,49.945 34.028,50.513 J2.8
REDBTN: C1.2 J2.6 R2.1 SW1.3 SW1.4 | length 45
  Top Layer w0.127: R2.1 SW1.3
  Top Layer w0.254: SW1.3 SW1.3@32.6,16.383 ; SW1.4 SW1.3@32.6,16.383 ; J2.6 39.395,34.091 38.154,32.85 C1.2 38.154,22.888 32.973,17.708 32.973,16.756 SW1.3@32.6,16.383
REDLED: J2.7 LD1.1 | length 5.5
  Top Layer w0.254: J2.7 37.836,49.819 LD1.1
YELLOWBTN: C3.2 J2.4 R4.1 SW3.3 SW3.4 | length 57.4
  Top Layer w0.127: R4.1@50.232,13.82 R4.1 SW3.3
  Top Layer w0.254: J2.4 44.475,50.592 44.513,50.554 44.229,50.554 40.886,47.211 40.886,37.101 44.165,33.822 53.371,33.822 55.502,31.692 C3.2 55.502,22.558 50.88,17.937 50.88,16.756 SW3.3@50.507,16.383 ; SW3.3 SW3.3@50.507,16.383 ; SW3.4 SW3.3@50.507,16.383